# EAGLE board tx (EAGLE 9.1.3)
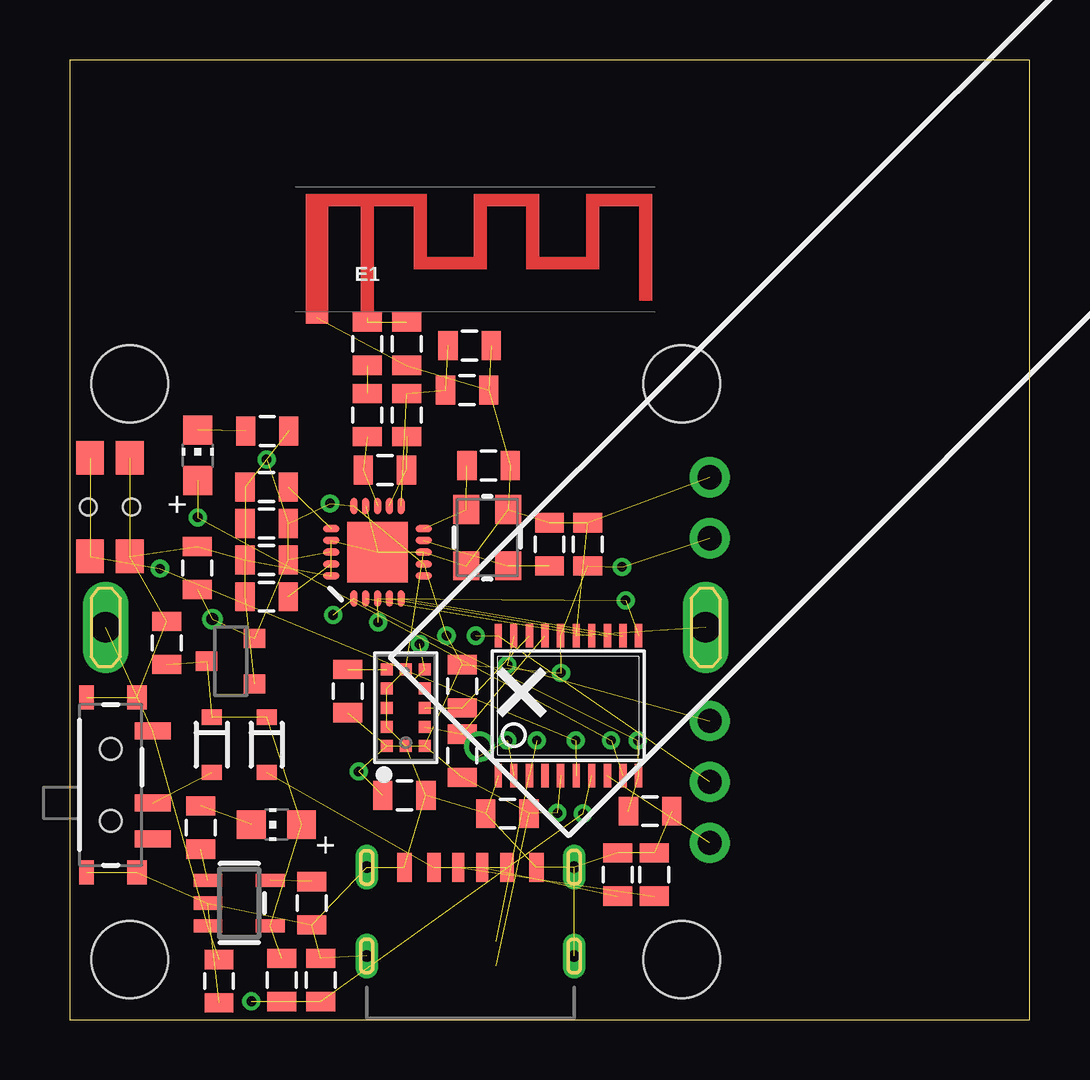
[diagram p0: board, top side]
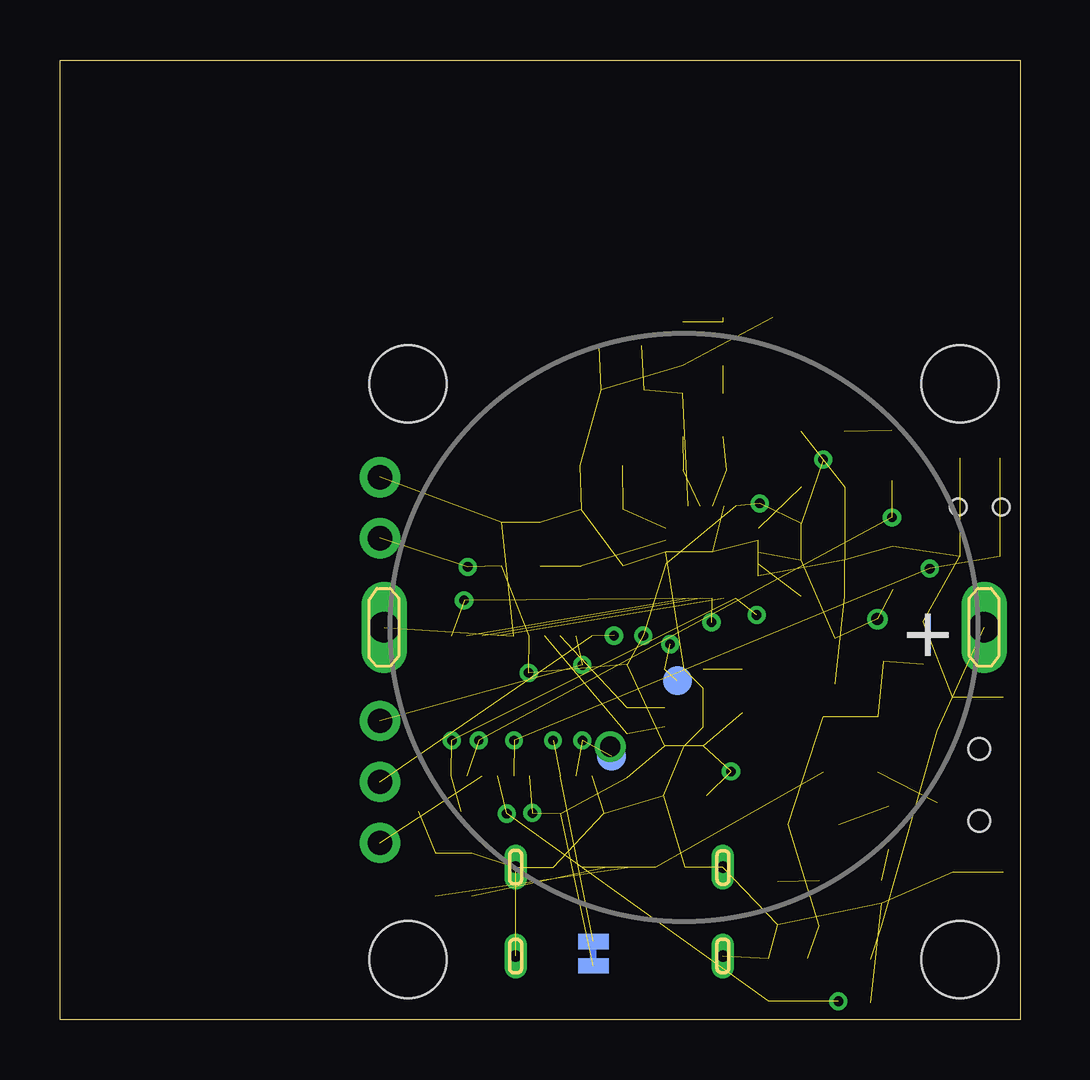
[diagram p1: board, bottom side, seen from below]

Size 40 x 40 mm. Coordinates in mm from the lower left corner, seen from the top.
Outline: 0,0 40,0 40,40 0,40 0,0
Copper layers (1*16): Top 0.035mm / dielectric 1.5mm / Bottom 0.035mm
Design rules "SparkFun-2-layer-6mil *": minimum track width 6mil, minimum drill 15mil, track to track 6mil, track to pad 6mil, pad to pad 6mil, via to via 6mil, smd to smd 6mil, copper to edge 10mil, drill to drill 6mil, minimum pad ring 7mil, minimum via ring 7mil, stop-mask expansion 4mil, vias tented up to drill 25mil, thermal gap 10mil
tRestrict: area 11.8,28.8 to 12.9,29.9

## Footprints (pad centres in the part's own frame; a part is rotated, then mirrored left to right if it is on the bottom)
TX_SPARKFUN-BATTERIES_BATTCON_24.5MM_PTH = drill 1.27 long: 1 -12.5,0; 2 12.5,0
0805 = smd 0.8 x 1.2: 1 -0.9,0; 2 0.9,0
SOD-323 = smd 0.63 x 0.83: A 1.15,0; C -1.15,0
TRACE_ANTENNA_2.4GHZ_15.2MM = smd 0.5 x 0.5: ANT 0,-0.25 | smd 0.9 x 0.5: GND -2.1,-0.25
1X03-CLEANBIG = drill 1.016 pad 1.676: 1 -2.54,0; 2 0,0; 3 2.54,0
CHIP-LED0805 = smd 1.2 x 1.2: A 0,-1.05; C 0,1.05
SWITCH-SPST-SMD-A = smd 0.7 x 1.5: 1 -2.25,-1.75; 2 -0.75,-1.75; 3 2.25,-1.75 | smd 1 x 0.6: G1 -3.65,1; G3 3.65,1 | smd 1 x 0.8: G2 -3.65,-1.1; G4 3.65,-1.1 | hole 0.9: -1.5,0; 1.5,0
SMT-JUMPER_2_NC_TRACE_NO-SILK = smd 0.635 x 1.27: 1 -0.508,0; 2 0.508,0
TP12R = smd 1.2 x 1.2: TP 0,0
LGA12_ST = smd 0.5 x 0.5: 1 1.6,-0.8; 2 0.8,-0.8; 3 0,-0.8; 4 -0.8,-0.8; 5 -1.6,-0.8; 6 -1.6,0; 7 -1.6,0.8; 8 -0.8,0.8; 9 0,0.8; 10 0.8,0.8; 11 1.6,0.8; 12 1.6,0
SOT23-5 = smd 0.55 x 1.2: 1 -0.95,-1.3; 2 0,-1.3; 3 0.95,-1.3; 4 0.95,1.3; 5 -0.95,1.3
L1_USBC_6P_PAC = drill 0.483 pad 0.94 long: 1 4.32,3.15; 2 -4.32,3.15; 3 -4.32,-0.55; 4 4.32,-0.55 | smd 0.5 x 1.2: CC1 -0.5,3.15; CC2 0.5,3.15 | smd 0.6 x 1.2: GND1 -2.75,3.15; GND2 2.75,3.15 | smd 0.56 x 1.2: VBUS1 -1.52,3.15; VBUS2 1.52,3.15
TSSOP20 = smd 0.305 x 0.991: 1 -2.925,-2.918; 2 -2.275,-2.918; 3 -1.625,-2.918; 4 -0.975,-2.918; 5 -0.325,-2.918; 6 0.325,-2.918; 7 0.975,-2.918; 8 1.625,-2.918; 9 2.275,-2.918; 10 2.925,-2.918; 11 2.925,2.918; 12 2.275,2.918; 13 1.625,2.918; 14 0.975,2.918; 15 0.325,2.918; 16 -0.325,2.918; 17 -0.975,2.918; 18 -1.625,2.918; 19 -2.275,2.918; 20 -2.925,2.918
QFN20_ALT1 = smd 2.515 x 2.515: 0 0,0 | smd 0.686 x 0.293: 1 -1.925,0.986; 2 -1.925,0.493; 3 -1.925,0; 4 -1.925,-0.493; 5 -1.925,-0.986; 11 1.925,-0.986; 12 1.925,-0.493; 13 1.925,0; 14 1.925,0.493; 15 1.925,0.986 | smd 0.293 x 0.686: 6 -0.986,-1.925; 7 -0.493,-1.925; 8 0,-1.925; 9 0.493,-1.925; 10 0.986,-1.925; 16 0.986,1.925; 17 0.493,1.925; 18 0,1.925; 19 -0.493,1.925; 20 -0.986,1.925
AAAWTF = drill 0.85: MINUS 22.91,0.17; PLUS -21.59,0.17
M3_MOUNTING_HOLE_PACK = hole 3.2: 0,0
SOT23R_INFINEON = smd 0.8 x 0.9: 1 -0.95,-1; 2 0.95,-1; 3 0,1
342_SWICH_FOOT_HOLE = smd 1.4 x 1.15: P$1 -2.05,-0.825; P$2 -2.05,0.825; P$3 2.05,0.825; P$4 2.05,-0.825 | hole 0.7: 0,0.9; 0,-0.9
1X02 = drill 1.016 pad 1.676: 1 -1.27,0; 2 1.27,0
CRYSTAL-SMD-3.2X2.5MM = smd 1.2 x 1.1: 1 -1.175,-0.875; 2 1.175,-0.875; 3 1.175,0.875; 4 -1.175,0.875

## Placement (x,y rotation side)
BT1  [TX_SPARKFUN-BATTERIES_BATTCON_24.5MM_PTH]  14,16.35 180 bottom
C1  100nF  [0805]  8.2,19.15 180 top
C2  2.2nF  [0805]  8.2,20.68 180 top
C3  100nF  [0805]  8.2,17.63 180 top
C4  1.5pF  [0805]  12.4,28.17 90 top
C5  1pF  [0805]  14.05,28.17 270 top
C6  2.2nF  [0805]  16.66,28.09 0 top
C7  4.7pF  [0805]  16.56,26.24 0 top
C8  22pF  [0805]  19.99,19.81 90 top
C9  22pF  [0805]  17.45,23.09 0 top
C10  4.7uF  [0805]  6.22,1.6 270 top
C11  4.7uF  [0805]  4.04,15.7 90 top
C12  4.7uF  [0805]  5.31,18.82 90 top
C13  100nF  [0805]  13.94,9.35 0 top
C14  100nF  [0805]  21.59,19.81 90 top
C15  100nF  [0805]  18.24,8.59 180 top
D1  BAT20J  [SOD-323]  8.2,11.46 270 top
D2  BAT20J  [SOD-323]  5.92,11.46 270 top
E1  ANT  [TRACE_ANTENNA_2.4GHZ_15.2MM]  12.4,29.51 0 top
JP1  [1X03-CLEANBIG]  26.67,9.91 90 top
L1  3.9nH  [0805]  12.4,25.2 90 top
L2  8.2nH  [0805]  13.13,22.91 0 top
L3  2.7nH  [0805]  14.05,25.2 90 top
LED1  [CHIP-LED0805]  8.61,8.13 90 top
LED2  [CHIP-LED0805]  5.33,23.52 0 top
R1  22K  [0805]  8.2,22.2 180 top
R2  5.1K  [0805]  24.36,6.05 90 top
R3  5.1K  [0805]  22.83,6.05 90 top
R4  5.1K  [0805]  5.46,8 270 top
R5  22K  [0805]  10.08,4.85 270 top
R6  5.1K  [0805]  16.36,13.89 90 top
R7  5.1K  [0805]  16.36,11 270 top
R8  22K  [0805]  11.58,13.69 270 top
R9  22K  [0805]  24.18,8.69 0 top
R10  22K  [0805]  8.84,1.65 90 top
R11  22K  [0805]  10.46,1.65 270 top
R12  5.1K  [0805]  8.23,24.54 180 top
S2  [SWITCH-SPST-SMD-A]  1.7,9.78 90 top
SJ2  JUMPER-SMT_2_NC_TRACE_NO-SILK  [SMT-JUMPER_2_NC_TRACE_NO-SILK]  17.78,2.74 90 bottom
TP1  TPTP12R  [TP12R]  14.27,14.12 0 bottom
TP2  TPTP12R  [TP12R]  17.02,10.97 0 bottom
U1  [LGA12_ST]  14,13 270 top
U3  MCP73831T-2ACI/OT  [SOT23-5]  7.06,4.85 270 top
U$1  L1_USBC_6P_DEV  [L1_USBC_6P_PAC]  16.7,3.2 0 top
U$2  STM32F030F4  [TSSOP20]  20.78,13.08 0 top
U$3  NRF24L01ALT1  [QFN20_ALT1]  12.83,19.48 90 top
U$4  AAA_SYM  [AAAWTF]  32.46,26.52 45 top
U$5  M3_MOUNTING_HOLE  [M3_MOUNTING_HOLE_PACK]  2.5,26.5 0 top
U$6  M3_MOUNTING_HOLE  [M3_MOUNTING_HOLE_PACK]  25.5,26.5 0 top
U$7  M3_MOUNTING_HOLE  [M3_MOUNTING_HOLE_PACK]  2.5,2.5 0 top
U$8  M3_MOUNTING_HOLE  [M3_MOUNTING_HOLE_PACK]  25.5,2.5 0 top
U$9  XC6206_DEV  [SOT23R_INFINEON]  6.71,14.94 90 top
U$10  324_SW324_SWITCH_FOOT_HOLE  [342_SWICH_FOOT_HOLE]  1.68,21.36 90 top
U$11  PINHD1X2  [1X02]  26.67,21.34 90 top
Y1  CRYSTAL-26MHZSMD-3.2X2.5  [CRYSTAL-SMD-3.2X2.5MM]  17.4,20.09 90 top

## Library data of the parts
BT1 = tx; SF_SKU: PRT-08863
C1-C9 C11-C15 = clock
C10 R4-R8 R10 R11 = SparkFun-Passives
D1 D2 = SparkFun-DiscreteSemi; PROD_ID: DIO-11623
E1 = SparkFun-RF
JP1 U$11 = adafruit_changed
L1-L3 = basicBoard
LED1 LED2 R1-R3 R9 R12 = joyAnalog
S2 U$1 = tx
SJ2 = SparkFun-Jumpers
TP1 TP2 = testpad
U1 = Adafruit VL53L0X
U3 = microbuilder
U$2 = exixe_pogo
U$3 = nRF24L01-Chip-v13
U$4 U$9 U$10 = 3pos_slide_switch
U$5-U$8 = L1
Y1 = SparkFun-Clocks; PROD_ID: XTAL-12454

## Nets
+3V3: C1.1 C2.1 C12.1 C13.1 C14.1 C15.1 R6.2 R7.2 R8.2 SJ2.1 U1.1 U1.11 U$2.5 U$2.16 U$3.7 U$3.15 U$3.18 U$9.2 U$11.1
GND: BT1.2 C1.2 C2.2 C3.2 C5.2 C6.2 C7.2 C8.2 C9.2 C10.2 C11.2 C12.2 C13.2 C14.2 C15.2 E1.GND R1.2 R2.2 R3.2 R5.2 R9.2 R11.1 R12.1 S2.G1 S2.G2 S2.G3 S2.G4 U1.2 U1.3 U1.4 U1.6 U1.12 U3.2 U$1.1 U$1.2 U$1.3 U$1.4 U$1.GND1 U$1.GND2 U$2.1 U$2.15 U$3.0 U$3.8 U$3.14 U$3.17 U$3.20 U$9.1 U$10.P$1 U$10.P$4 U$11.2 Y1.2 Y1.4
N$1: C3.1 U$3.19
N$2: R1.1 U$3.16
N$3: L1.1 L2.1 U$3.13
N$4: C4.1 L1.2
N$5: C4.2 C5.1 E1.ANT
N$6: L2.2 L3.1 U$3.12
N$7: C8.1 U$3.9 Y1.1
N$8: C6.1 C7.1 L3.2 U$3.11
N$9: C9.1 U$3.10 Y1.3
N$10: R3.1 U$1.CC2
N$11: R2.1 U$1.CC1
N$12: LED1.C R4.1
N$13: R4.2 U3.1
N$14: U$2.13 U$3.4
N$15: U$2.12 U$3.5
N$16: U$2.11 U$3.3
N$17: R5.1 U3.5
N$18: R6.1 U1.9 U$2.18
N$19: D2.A S2.2
N$20: U$2.14 U$3.2
N$21: R9.1 U$2.10 U$3.1
N$22: R7.1 U1.10 U$2.17
N$24: R8.1 U1.5
N$25: BT1.1 C10.1 S2.3 U3.3
N$26: D1.A U$1.VBUS1 U$1.VBUS2
N$27: C11.1 D1.C D2.C LED1.A R10.2 U3.4 U$9.3
N$28: LED2.C R12.2
N$29: LED2.A U$2.9
N$30: U$2.6 U$10.P$2 U$10.P$3
N$31: JP1.3 U$2.19
N$32: JP1.2 U$2.20
N$33: JP1.1 U$2.8
N$34: SJ2.2 U$2.3
N$35: R10.1 R11.2 U$2.7
N$36: TP1.TP U1.7
N$37: TP2.TP U$2.2

## Tracks (layer width: path | path; a pad name or v marks a point on that pad's centre or on a via)
+3V3  (via drill 0.4, 0.5)  (26 unrouted)
  other vias: 5.94,16.69 10.85,21.51 8.2,23.34 12.04,10.34 15.7,16 23.01,18.87 20.32,8.61 20.47,14.45
GND  (51 unrouted)
N$1  (1 unrouted)
N$2  (1 unrouted)
N$3  (2 unrouted)
N$4  (1 unrouted)
N$5  (2 unrouted)
N$6  (2 unrouted)
N$7  (2 unrouted)
N$8  (3 unrouted)
N$9  (2 unrouted)
N$10  (1 unrouted)
N$11  (1 unrouted)
N$12  (1 unrouted)
N$13  (1 unrouted)
N$14  (1 unrouted)
N$15  (1 unrouted)
N$16  (via drill 0.4)  (3 unrouted)
  other vias: 12.85,16.56 23.16,17.48
N$17  (1 unrouted)
N$18  (2 unrouted)
N$19  (1 unrouted)
N$20  (1 unrouted)
N$21  (via drill 0.4)  (4 unrouted)
  other vias: 10.97,16.87 23.67,11.63
N$22  (2 unrouted)
N$24  (1 unrouted)
N$25  (3 unrouted)
N$26  (2 unrouted)
N$27  (6 unrouted)
N$28  (1 unrouted)
N$29  (via drill 0.38, 0.4)  (3 unrouted)
  other vias: 22.56,11.63 5.33,20.93
N$30  (via drill 0.38, 0.4)  (4 unrouted)
  other vias: 21.08,11.63 3.76,18.8
N$31  (via drill 0.4)  (2 unrouted)
  other vias: 18.24,14.78
N$32  (via drill 0.4)  (2 unrouted)
  other vias: 16.92,16
N$33  (1 unrouted)
N$34  (via drill 0.38)  (2 unrouted)
  other vias: 19.46,11.63
N$35  (via drill 0.4)  (4 unrouted)
  other vias: 21.39,8.59 7.57,0.76
N$36  (via drill 0.4)  (2 unrouted)
  other vias: 14.58,15.65
N$37  (via drill 0.4)  (2 unrouted)
  other vias: 18.24,11.63